# Altium PCB 平衡车主板.PcbDoc
Units mil, origin at the board's own origin, x right, y up, seen from the top; angles counter-clockwise.
Board outline 4685.04 x 2519.69 mil, 2 copper layers (Top Layer, Bottom Layer); 19 components, 30 nets, 117 pads, 23 vias.
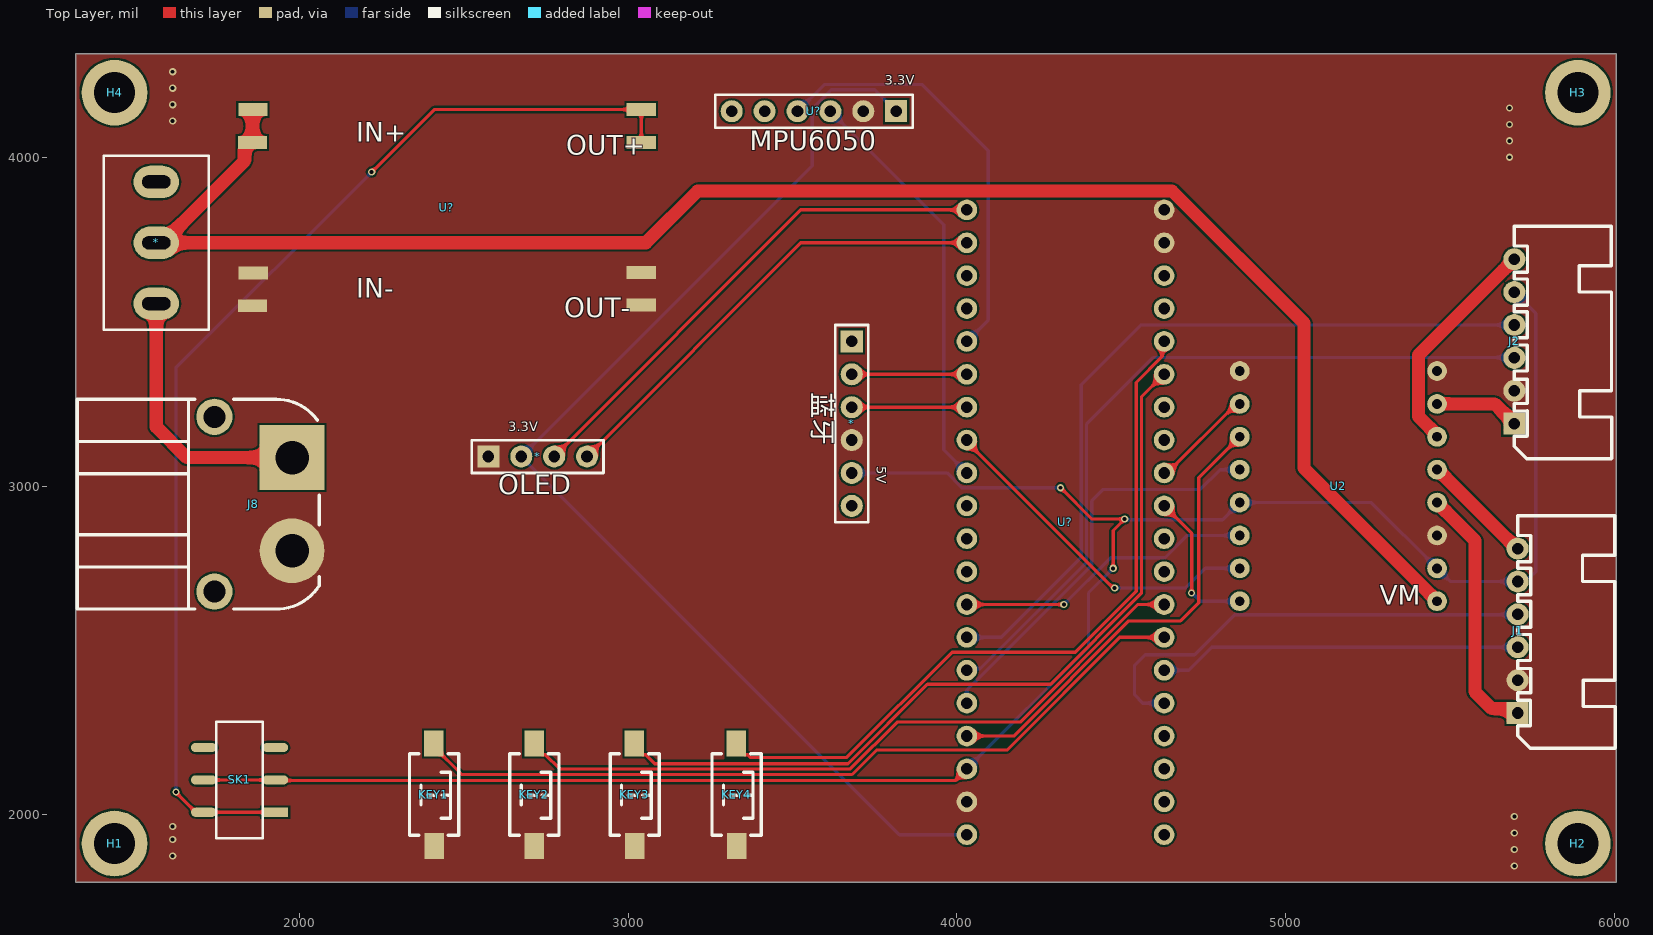
[diagram p0: Top Layer view]
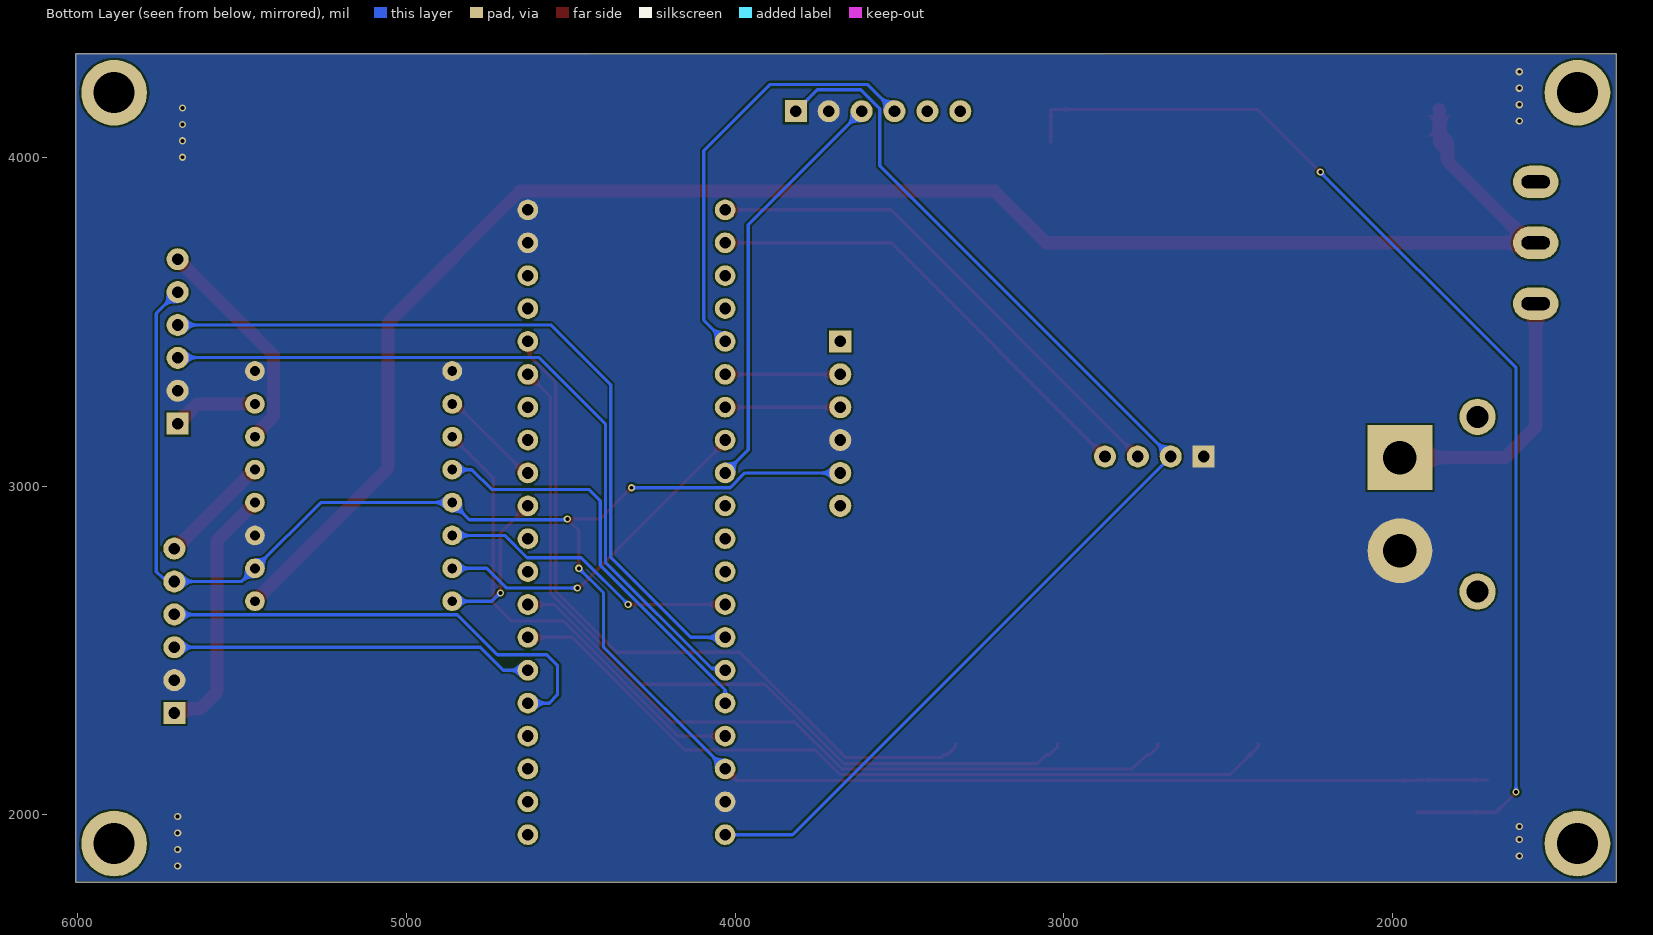
[diagram p1: Bottom Layer view, seen from below]

## Layer stack, top to bottom
Top Solder: solder mask 0.4, Solder Resist, Dk 3.5
Top Layer: signal copper 1.4
Dielectric 1: dielectric 12.6, FR-4, Dk 4.8
Bottom Layer: signal copper 1.4
Bottom Solder: solder mask 0.4, Solder Resist, Dk 3.5

## Board outline
1320,1795 6005.04,1795 6005.04,4314.69 1320,4314.69

## Design rules (kind name [scope] priority, off if disabled: settings)
Clearance [All] p1: gap=6 ignorepadtopadclearanceinfootprint=FALSE
PlaneConnect [All] p1: planeconnectstyle=Direct reliefexpansion=20 reliefentries=4 reliefconductorwidth=10 reliefairgap=10
PolygonConnect [All] p1: connectstyle=Direct reliefconductorwidth=10 reliefentries=4 polygonreliefangle="90 Angle" airgapwidth=10
RoutingVias [All] p1: holewidth=28 width=50 viastyle="Through Hole" minholewidth=28 minwidth=50 maxholewidth=28 maxwidth=50
SolderMaskExpansion [All] p1: expansion=4 istentingtop=FALSE
Width [All] p1: maxlimit=100 minlimit=6 preferedwidth=6
29 further rules are at their usual default settings.

## Classes and differential pairs
component class 平衡车主板: * H1 H2 H3 H4 J1 J2 J8 KEY1 KEY2 KEY3 KEY4 SK1 U2 U?

## Components (designator, comment, footprint, x,y, rotation, side; value= is the part's Value field where it differs from the comment)
* "蓝牙" HDR2.54-M-LI-6P 3680,3190 r270 top
* "OLED" HDR2.54-M-LI-4P 2725,3090 r0 top
* "电源开关" MTS-10x 1565,3740.04 r90 top
H1 "铜柱孔" M3x10_L 1438.11,1913.11 r0 top
H2 "铜柱孔" M3x10_L 5888.11,1912.97 r0 top
H3 "铜柱孔" M3x10_L 5888.11,4196.43 r0 top
H4 "铜柱孔" M3x10_L 1438.11,4196.43 r0 top
J1 "左前轮" XH2.54-WI-6P 5705,2560 r90 top
J2 "右前轮" XH2.54-WI-6P 5695,3440 r90 top
J8 "7.4V电源接口" TX60PW-M20 1860,2945 r270 top
KEY1 "按键" "TSW SMD-3*6*2.5" 2410,2060 r270 top
KEY2 "按键" "TSW SMD-3*6*2.5" 2715,2060 r270 top
KEY3 "按键" "TSW SMD-3*6*2.5" 3020,2060 r270 top
KEY4 "按键" "TSW SMD-3*6*2.5" 3330,2060 r270 top
SK1 "开关" LQ_SW_MSS22D18 1818.27,2106.57 r180 top
U2 "TB6612" TB6612 5320,2715 r180 top
U? "MPU6050" MPU6050 3815,4140 r180 top
U? "STM32F103C8T6核心板" STM32核心板 4630,1940 r180 top
U? "mini560" mini560 1857.47,3620 r0 top

## Footprints (in the part's own frame and the unit in brackets; to place one, negate y for a bottom-side part, rotate by r counter-clockwise, add the part's x,y. Pads: shape width x height; smd on the part's side, far side on the other; paste and mask are expansions set on the pad)
HDR2.54-M-LI-4P [mm] "排母，4脚"
  rect 1.7x1.7 hole 0.9: 1(-3.81,0)
  round 1.7 hole 0.9: 2(-1.27,0) 3(1.27,0) 4(3.81,0)
  silkscreen extent -5.08,-1.27 5.08,1.27, body extent -5.08,-1.27 5.08,1.27, height 8.5
HDR2.54-M-LI-6P [mm] "排母，6脚"
  rect 1.7x1.7 hole 0.9: 1(-6.35,0)
  round 1.7 hole 0.9: 2(-3.81,0) 3(-1.27,0) 4(1.27,0) 5(3.81,0) 6(6.35,0)
  silkscreen extent -7.62,-1.27 7.62,1.27, body extent -7.62,-1.27 7.62,1.27, height 8.5
LQ_SW_MSS22D18 [mm]
  rect 2x0.7 smd: 1(-2.75,2.5)
  oval 2x0.7 smd: 1(2.75,2.5) 2(-2.75,0) 2(2.75,0) 3(-2.75,-2.5) 3(2.75,-2.5)
  silkscreen extent -1.8,-4.5 1.8,4.5
M3x10_L [mil] "M3铜柱，长：10mm"
  round 200 hole 125: 1(0,0)
  body extent -106,-93 106,93, height 396
mini560 [mm]
  rect 2.25x1 smd: 1(0,10.795) 1(0.036,13.339) 2(0.018,-1.817) 2(0.063,0.723) 3(30.036,-1.764) 3(30.036,0.762) 4(30.036,10.795) 4(30.036,13.339)
MPU6050 [mm]
  rect 1.7x1.7 hole 0.9: 1(0,0)
  round 1.7 hole 0.9: 2(2.54,0) 3(5.08,0) 4(7.62,0) 5(10.16,0) 6(12.7,0)
  silkscreen extent -1.27,-1.27 13.97,1.27, body extent -1.27,-1.27 13.97,1.27, height 8.5
MTS-10x [mm] "MTS10系列3脚扭子开关"
  oval 2.5x3.5 hole 1 slot 2.2 at 90 deg: 1(-4.7,0) 2(0,0) 3(4.7,0)
  silkscreen extent -6.73,-4.06 6.73,4.06, body extent -6.6,-3.95 6.6,3.95, height 30.47
STM32核心板 [mm]
  round 1.6 hole 0.9: 1(0,0) 2(0,-2.54) 3(0,-5.08) 4(0,-7.62) 5(0,-10.16) 6(0,-12.7) 7(0,-15.24) 8(0,-17.78) 9(0,-20.32) 10(0,-22.86) 11(0,-25.4) 12(0,-27.94) 13(0,-30.48) 14(0,-33.02) 15(0,-35.56) 16(0,-38.1) 17(0,-40.64) 18(0,-43.18) 19(0,-45.72) 20(0,-48.26) 21(15.24,-48.26) 22(15.24,-45.72) 23(15.24,-43.18) 24(15.24,-40.64) 25(15.24,-38.1) 26(15.24,-35.56) 27(15.24,-33.02) 28(15.24,-30.48) 29(15.24,-27.94) 30(15.24,-25.4) 31(15.24,-22.86) 32(15.24,-20.32) 33(15.24,-17.78) 34(15.24,-15.24) 35(15.24,-12.7) 36(15.24,-10.16) 37(15.24,-7.62) 38(15.24,-5.08) 39(15.24,-2.54) 40(15.24,0)
TB6612 [mil]
  round 60 hole 30: 1(-140,65) 2(-140,-35) 3(-140,-135) 4(-140,-235) 5(-140,-335) 6(-140,-435) 7(-140,-535) 8(-140,-635) 9(460,-635) 10(460,-535) 11(460,-435) 12(460,-335) 13(460,-235) 14(460,-135) 15(460,-35) 16(460,65)
"TSW SMD-3*6*2.5" [mm] "3*6*2.5mm"
  rect 2x1.5 smd: 1(-3.996,-0.02) 2(3.937,0)
  silkscreen extent -3.21,-1.9 3.09,1.9, body extent -4,-1.88 4,1.62, height 2.59
TX60PW-M20 [mm] "长：18.8mm， 宽：16mm，高：8.6mm"
  round 2.8 hole 1.7: 0(-6.75,-3) 0(6.75,-3)
  rect 5x5 hole 2.6: 1(-3.6,3)
  round 5 hole 2.6: 2(3.6,3)
  silkscreen extent -8.1,-13.6 8.1,5.1, body extent -8,-13.6 8,5.02, height 8.65
XH2.54-WI-6P [mm] "接插件，6P"
  rect 1.7x1.7 hole 0.9: 1(-6.35,0)
  round 1.7 hole 0.9: 2(-3.81,0) 3(-1.27,0) 4(1.27,0) 5(3.81,0) 6(6.35,0)
  silkscreen extent -9.07,-7.53 8.89,0, body extent -8.85,-7.35 8.85,0.35, height 5.75

## Part data
J1 J2: library part 编码器
U?: "DC-DC稳压模块"

## Via types
v1: diameter 22, hole 12, Top Layer to Bottom Layer, tented both sides, 23 vias

## Nets (pads, with @x,y where several pads share a name; then routed paths per layer and width w, separated by ;. In a path a pad name is that pad's centre, name@x,y a point inside that pad or via, vN(x,y) a via of type N, cw(c..) or ccw(c..) an arc to the next point about the centre after c; other vN are vias at no path point)
5v: SK1.1 U?.4@3040,4045 U?.4@3040,4145.18 | length 3458.3
  Top Layer w10: v1(1625,2070) 1625,2068.78 1685.63,2008.15 1710,2008.15 SK1.1@1926.54,2008.15 ; v1(2220,3955) 2410.18,4145.18 3040,4145.18 U?.4@3040,4045
  Bottom Layer w10: v1(1625,2070) 1625,3360 v1(2220,3955)
AIN1: U2.14 U?.33 | length 917
  Top Layer w10: U?.33 v1(4325,2640)
  Bottom Layer w10: v1(4325,2640) 4467.5,2782.5 4632.59,2782.5 4700.1,2850 U2.14
AIN2: U2.15 U?.28 | length 1043.8
  Top Layer w10: U?.28 4030,3135 4472.24,2692.76 4477.24,2692.76 v1(4479.53,2690.47)
  Bottom Layer w10: v1(4479.53,2690.47) 4696.15,2690.47 4755.68,2750 U2.15
BIN1: U2.12 U?.36 | length 1261.8
  Bottom Layer w10: U?.36 4030,2380 4058.28,2408.28 ccw(c4030,2440) 4061.72,2411.72 4410,2760 4410,2955 4445,2990 4740.1,2990 4800.1,3050 U2.12
BIN2: U2.11 U?.37 | length 1429.5
  Top Layer w10: U?.37 4172.37,2240 4522.37,2590 4680,2590 4735,2645 4735,3025 U2.11
FL+: J1.1 U2.4 | length 779.6
  Top Layer w40: U2.4 5575,2835 5575,2375 5626.54,2323.46 5691.54,2323.46 J1.1
FL-: J1.6 U2.5 | length 344.4
  Top Layer w40: U2.5 5462.5,3050 5702.5,2810 J1.6
FR+: J2.1 U2.7 | length 259.9
  Top Layer w40: U2.7 5635,3250 J2.1
FR-: J2.6 U2.6 | length 683.7
  Top Layer w40: U2.6 5460,3155.41 5404,3211.41 5404,3399 J2.6
GND: *.1@2575,3090 *.4@3680,3140 J1.2 J2.2 J8.2 KEY1.2 KEY2.2 KEY3.2 KEY4.2 U2.3 U2.8 U2.9 U?.2@1858.2,3548.48 U?.2@1859.95,3648.46 U?.2@3715,4140 U?.3@3040,3550.56 U?.3@3040,3650 U?.19 U?.20 U?.39
  other v1: 5695,1845 1615,1875 5695,1895 1615,1925 5695,1945 1615,1965 5695,1995 5680,4000 5680,4050 5680,4100 1615,4110 5680,4150 1615,4160 1615,4210 1615,4260
KEY1: KEY1.1 U?.7 | length 2438.3
  Top Layer w10: KEY1.1 2409.21,2207.47 2493.69,2123 3680.88,2123 3755.39,2197.5 4152.5,2197.5 4495,2540 U?.7
KEY2: KEY2.1 U?.8 | length 2160.7
  Top Layer w10: KEY2.1 2714.21,2207.47 2738.74,2182.94 2748.58,2182.94 2791.53,2140 3675.25,2140 3817.75,2282.5 4192.24,2282.5 4549.75,2640 U?.8
KEY3: KEY3.1 U?.15 | length 2482.2
  Top Layer w10: KEY3.1 3019.21,2207.47 3043.74,2182.94 3053.58,2182.94 3080.53,2156 3668.63,2156 3910.13,2397.5 4284.62,2397.5 4561,2673.88 4561,3271 U?.15
KEY4: KEY4.1 U?.16 | length 2275.8
  Top Layer w10: KEY4.1@3329.21,2207.47 3353.74,2182.94 3363.58,2182.94 3371.53,2175 3665,2175 3985,2495 4359.49,2495 4545,2680.51 4545,3315.1 4623.41,3393.5 4623.41,3433.41 U?.16 ; KEY4.1 3329.21,2209.53 KEY4.1@3353.74,2185
L_A: J1.4 U?.5@4630,2340 | length 1419.6
  Bottom Layer w10: U?.5@4630,2340 4565,2340 4540,2365 4540,2455 4572.5,2487.5 4722.5,2487.5 4844,2609 5704,2609 J1.4
L_B: J1.3 U?.6@4630,2440 | length 1104
  Bottom Layer w10: U?.6@4630,2440 4705,2440 4775,2510 J1.3
LPWM: U2.16 U?.11 | length 457.6
  Top Layer w10: U?.11 4714,2856 4714,2680 4713,2679 v1(4713,2675)
  Bottom Layer w10: v1(4713,2675) 4715,2675 4740,2650 U2.16
Net*_1: *.1@1565,3555 J8.1 | length 826.7
  Top Layer w40: *.1@1565,3555 1565,3180 1658.27,3086.73 J8.1
OLED_SCL: *.3@2775,3090 U?.21 | length 1565.7
  Top Layer w10: *.3@2775,3090 3525,3840 U?.21
OLED_SDA: *.4@2875,3090 U?.22 | length 1424.2
  Top Layer w10: *.4@2875,3090 3525,3740 U?.22
R_A: J2.4 U?.34 | length 2366
  Bottom Layer w10: U?.34 4135,2540 4378,2783 4378,3308 4560,3490 J2.4
R_B: J2.3 U?.35 | length 2305.4
  Bottom Layer w10: U?.35 4035.38,2445.38 4070.38,2445.38 4394,2769 4394,3189 4596,3391 5694,3391 J2.3
RPWM: U2.10 U?.12 | length 317
  Top Layer w10: U?.12 4640,3040 4850,3250 U2.10
RXD: *.2@3680,3340 U?.26 | length 350
  Top Layer w10: *.2@3680,3340 U?.26
SCL: U?.3@3615,4140 U?.29 | length 1271.9
  Bottom Layer w10: U?.3@3615,4140 3960,3795 3960,3110 U?.29
SDA: U?.4@3515,4140 U?.25 | length 1303.7
  Bottom Layer w10: U?.4@3515,4140 3596,4221 3894,4221 4095,4020 4095,3505 U?.25
TXD: *.3@3680,3240 U?.27 | length 350
  Top Layer w10: *.3@3680,3240 U?.27
V3.3: *.2@2675,3090 U?.1@3815,4140 U?.40 | length 3561.4
  Bottom Layer w10: U?.1@3815,4140 3750,4205 3617.12,4205 3559.46,4147.35 3559.46,3974.46 2675,3090 3825,1940 U?.40
V5: *.5 J1.5 J2.5 SK1.2 U2.2 U2.13 U?.38 | length 6443.5
  Top Layer w10: SK1.2@1710,2106.57 1926.54,2106.57 1928.11,2105 3995,2105 U?.38 ; v1(4315,2995) 4410,2900 v1(4510,2900) 4475,2865 v1(4475,2750)
  Bottom Layer w10: *.5 3969.9,3040 4014.9,2995 v1(4315,2995) ; U?.38 4400,2510 4400,2675 v1(4475,2750) ; v1(4510,2900) 4513.25,2900 4515.74,2897.5 4807.5,2897.5 U2.13 5260,2950 U2.2 5500,2710 J1.5 5715.89,2720.89 5740.89,2720.89 5760,2740 5760,3525 J2.5
VM: *.2@1565,3740.04 U2.1 U?.1@1857.47,4045 U?.1@1858.9,4145.18 | length 5268.9
  Top Layer w40: *.2@1565,3740.04 *.2@1584.69,3740.04 ; U?.1@1858.9,4145.18 1857.79,4145.18 1857.47,4144.86 1857.47,4045 1833.5,4045 1833.18,4044.69 1833.18,3988.54 *.2@1584.69,3740.04 ; U2.1 5054.99,3055.01 5054.99,3496.32 4653.82,3897.5 3211.47,3897.5 3054.02,3740.04 *.2@1584.69,3740.04
pads on no net: *.1@3680,3440 *.3@1565,3925.08 *.6 H1.1 H2.1 H3.1 H4.1 J8.0 SK1.3 U?.1@4630,1940 U?.2@4630,2040 U?.3@4630,2140 U?.4@4630,2240 U?.5@3415,4140 U?.6@3315,4140 U?.9 U?.10 U?.13 U?.14 U?.17 U?.18 U?.23 U?.24 U?.30 U?.31 U?.32

## Polygon pours and split planes (outlines as drawn)
GND on Top Layer "GND_L01_P000" (solid, pour order 0): 1320,4315 1320,1795 6005,1795 6005,4315
GND on Bottom Layer "GND_L02_P001" (solid, pour order 1): 1325,4310 1325,1800 6005,1800 6005,4315

## Silkscreen, mask and mechanical layers (free items; w line width, h text height)
Top Overlay:
  text "3.3V" at 3780,4210.55 h50
  text "MPU6050" at 3370,4001.05 h100
  text "蓝牙" at 3543.38,3285 h100 r270
  text "3.3V" at 2635,3155.55 h50
  text "5V" at 3745.53,3060 h50 r270
  text "OLED" at 2605,2956.05 h100
  text "VM" at 5285.06,2620 h100
Mechanical 1:
  the board outline again, w5

## Dimensions
1438.11,4196.43 to 5888.11,4196.43 on Top Overlay
1438.11,4196.43 to 1438.11,1913.11 on Top Overlay

## Text inside footprints (layer, text, board x,y; h text height)
U?: Top Overlay "IN+" at 2173.66,4027.81 h100; Top Overlay "OUT+" at 2811.38,3988.3 h100; Top Overlay "OUT-" at 2806.22,3493.46 h100; Top Overlay "IN-" at 2173.5,3552.97 h100